# Altium PCB PowerBoard.PcbDoc
Units mm, origin at the board's own origin, x right, y up, seen from the top; angles counter-clockwise.
Board outline 99.35 x 133.95 mm, 4 copper layers (Top Layer, Signal Layer 1, Signal Layer 2, Bottom Layer), stack 1.55 mm thick; 65 components, 18 nets, 330 pads, 142 vias.
Unrouted connection lines stored in the file: 233.
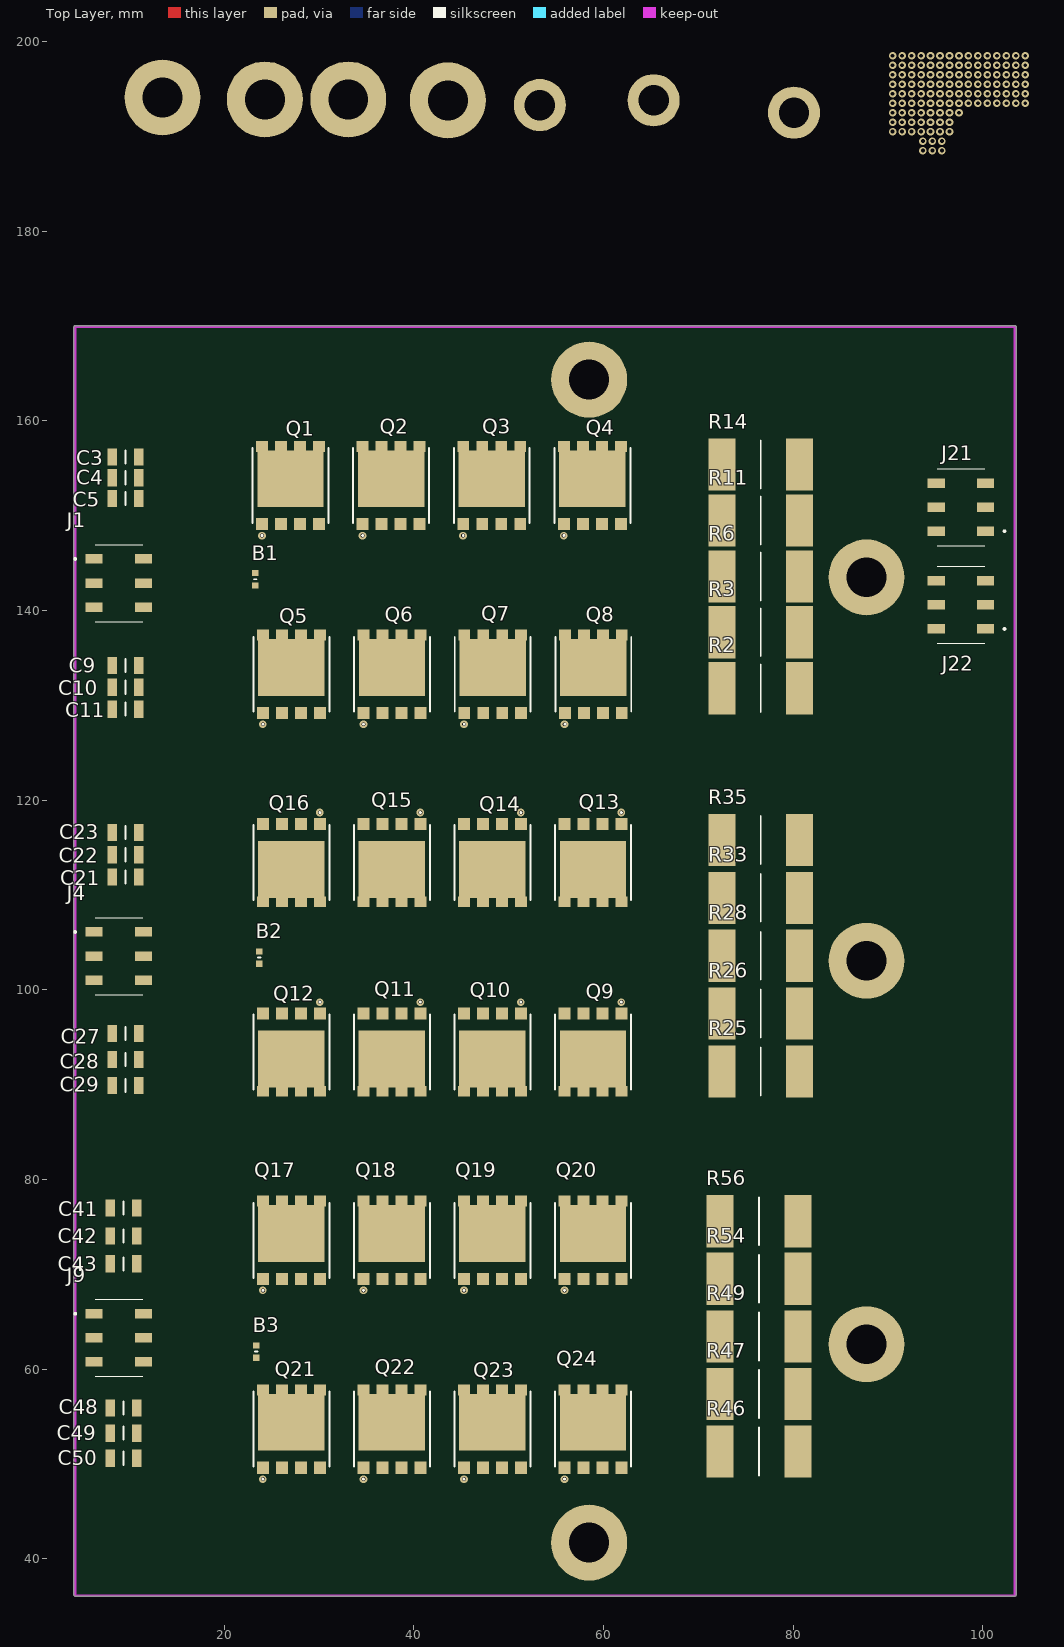
[diagram p0: Top Layer view]
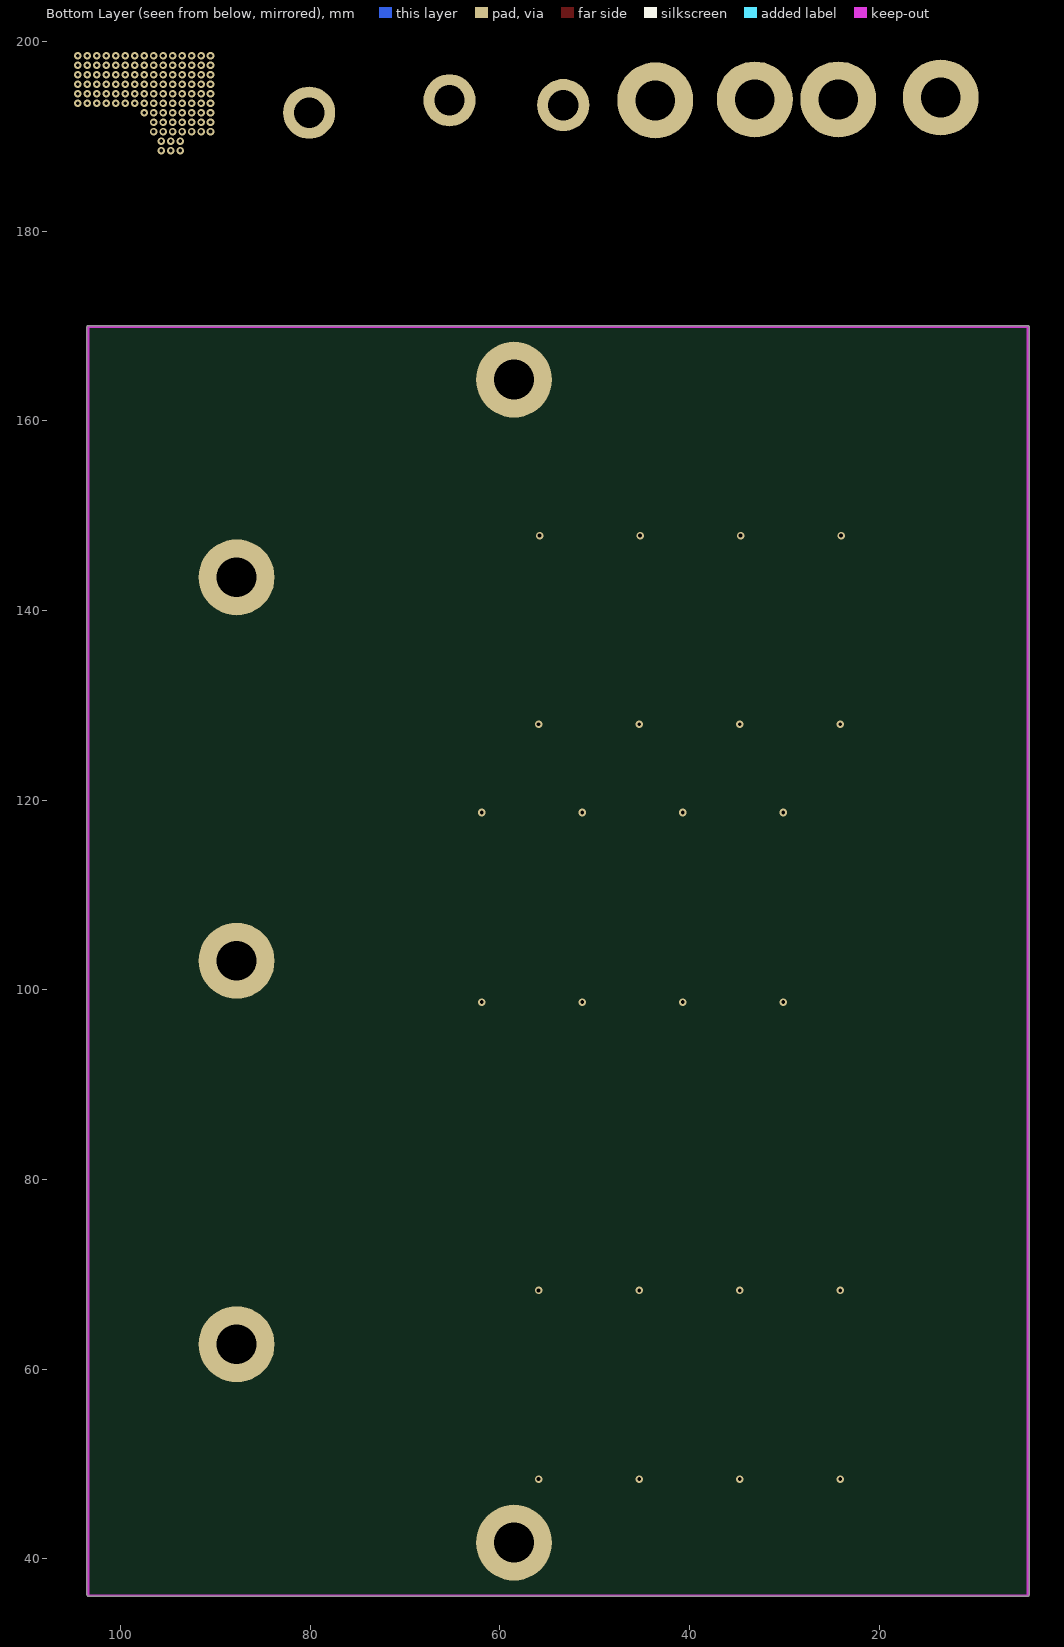
[diagram p1: Bottom Layer view, seen from below]

## Layer stack, top to bottom
Top Solder: solder mask 0.025, Solder Resist, Dk 3.5
Top Layer: signal copper 0.018
Dielectric 2: core 0.254, Dk 4.2
Signal Layer 1: signal copper 0.036
Dielectric 4: core 0.934, Dk 4.2
Signal Layer 2: signal copper 0.036
Dielectric 3: core 0.254, Dk 4.2
Bottom Layer: signal copper 0.018
Bottom Solder: solder mask 0.025, Solder Resist, Dk 3.5

## Board outline
4.173,36.2 4.173,169.9 cw(c4.3,169.9) 4.3,170.027 103.4,170.027 cw(c103.4,169.9) 103.527,169.9 103.527,36.2 cw(c103.4,36.2) 103.4,36.073 4.3,36.073 cw(c4.3,36.2)

## Design rules (kind name [scope] priority, off if disabled: settings)
AssemblyTestPointUsage AssemblyTestPointUsage_1 [All] p2:
AssemblyTestpoint AssemblyTestpoint_1 [All] p1: testpointundercomponent=TRUE minsize=1.016 maxsize=2.54 preferedsize=1.524 minholesize=0 maxholesize=1.016 preferedholesize=0.813 testpointgrid=0.025 usegrid=TRUE gridtolerance=0 allowsidetop=TRUE allowsidebottom=TRUE
Clearance Clearance_1 [All] p1: gap=0.5 ignorepadtopadclearanceinfootprint=FALSE except(0: Arc-Hole Track-Hole SMDPad-Hole THPad-Hole Via-Hole Fill-Hole Poly-Hole Region-Hole Text-Hole; 0.2: Arc-Arc Arc-Track Arc-SMDPad Arc-THPad Arc-Via Track-Track Track-SMDPad Track-THPad Track-Via SMDPad-SMDPad SMDPad-THPad SMDPad-Via THPad-THPad THPad-Via Via-Via)
ComponentClearance ComponentClearance_1 [All] p1: gap=0.2 collisioncheckmode=3 verticalgap=0.2 showdistances=TRUE
DiffPairsRouting DiffPairsRouting_1 [All] p1: maxlimit=0.254 minlimit=0.254 mostfreqgap=0.254 substack1={0391787D-B3DB-4B16-B312-97C439599AB4} toplayer_{0391787d-b3db-4b16-b312-97c439599ab4}_minwidth=0.381 toplayer_{0391787d-b3db-4b16-b312-97c439599ab4}_maxwidth=0.381 toplayer_{0391787d-b3db-4b16-b312-97c439599ab4}_prefwidth=0.381 midlayer1_{0391787d-b3db-4b16-b312-97c439599ab4}_minwidth=0.381 midlayer1_{0391787d-b3db-4b16-b312-97c439599ab4}_maxwidth=0.381 midlayer1_{0391787d-b3db-4b16-b312-97c439599ab4}_prefwidth=0.381 midlayer2_{0391787d-b3db-4b16-b312-97c439599ab4}_minwidth=0.381 midlayer2_{0391787d-b3db-4b16-b312-97c439599ab4}_maxwidth=0.381 midlayer2_{0391787d-b3db-4b16-b312-97c439599ab4}_prefwidth=0.381 bottomlayer_{0391787d-b3db-4b16-b312-97c439599ab4}_minwidth=0.381 bottomlayer_{0391787d-b3db-4b16-b312-97c439599ab4}_maxwidth=0.381 bottomlayer_{0391787d-b3db-4b16-b312-97c439599ab4}_prefwidth=0.381 substack2={0E55BCC6-0461-4BB8-A6DB-68FAAC3CF03A} toplayer_{0e55bcc6-0461-4bb8-a6db-68faac3cf03a}_minwidth=0.381 toplayer_{0e55bcc6-0461-4bb8-a6db-68faac3cf03a}_maxwidth=0.381 toplayer_{0e55bcc6-0461-4bb8-a6db-68faac3cf03a}_prefwidth=0.381 midlayer1_{0e55bcc6-0461-4bb8-a6db-68faac3cf03a}_minwidth=0.381 midlayer1_{0e55bcc6-0461-4bb8-a6db-68faac3cf03a}_maxwidth=0.381 midlayer1_{0e55bcc6-0461-4bb8-a6db-68faac3cf03a}_prefwidth=0.381 midlayer2_{0e55bcc6-0461-4bb8-a6db-68faac3cf03a}_minwidth=0.381 midlayer2_{0e55bcc6-0461-4bb8-a6db-68faac3cf03a}_maxwidth=0.381 midlayer2_{0e55bcc6-0461-4bb8-a6db-68faac3cf03a}_prefwidth=0.381 bottomlayer_{0e55bcc6-0461-4bb8-a6db-68faac3cf03a}_minwidth=0.381 bottomlayer_{0e55bcc6-0461-4bb8-a6db-68faac3cf03a}_maxwidth=0.381 bottomlayer_{0e55bcc6-0461-4bb8-a6db-68faac3cf03a}_prefwidth=0.381 substack3={7F91D735-8F98-4998-8FBE-C2B075826548} toplayer_{7f91d735-8f98-4998-8fbe-c2b075826548}_minwidth=0.381 toplayer_{7f91d735-8f98-4998-8fbe-c2b075826548}_maxwidth=0.381 toplayer_{7f91d735-8f98-4998-8fbe-c2b075826548}_prefwidth=0.381 midlayer1_{7f91d735-8f98-4998-8fbe-c2b075826548}_minwidth=0.381 midlayer1_{7f91d735-8f98-4998-8fbe-c2b075826548}_maxwidth=0.381 midlayer1_{7f91d735-8f98-4998-8fbe-c2b075826548}_prefwidth=0.381 midlayer2_{7f91d735-8f98-4998-8fbe-c2b075826548}_minwidth=0.381 midlayer2_{7f91d735-8f98-4998-8fbe-c2b075826548}_maxwidth=0.381 midlayer2_{7f91d735-8f98-4998-8fbe-c2b075826548}_prefwidth=0.381 bottomlayer_{7f91d735-8f98-4998-8fbe-c2b075826548}_minwidth=0.381 bottomlayer_{7f91d735-8f98-4998-8fbe-c2b075826548}_maxwidth=0.381 bottomlayer_{7f91d735-8f98-4998-8fbe-c2b075826548}_prefwidth=0.381 substack4={4ED4D01E-40BF-4D50-BA5A-F23A5EC9E761} toplayer_{4ed4d01e-40bf-4d50-ba5a-f23a5ec9e761}_minwidth=0.381 toplayer_{4ed4d01e-40bf-4d50-ba5a-f23a5ec9e761}_maxwidth=0.381 toplayer_{4ed4d01e-40bf-4d50-ba5a-f23a5ec9e761}_prefwidth=0.381 midlayer1_{4ed4d01e-40bf-4d50-ba5a-f23a5ec9e761}_minwidth=0.381 midlayer1_{4ed4d01e-40bf-4d50-ba5a-f23a5ec9e761}_maxwidth=0.381 midlayer1_{4ed4d01e-40bf-4d50-ba5a-f23a5ec9e761}_prefwidth=0.381 midlayer2_{4ed4d01e-40bf-4d50-ba5a-f23a5ec9e761}_minwidth=0.381 midlayer2_{4ed4d01e-40bf-4d50-ba5a-f23a5ec9e761}_maxwidth=0.381 midlayer2_{4ed4d01e-40bf-4d50-ba5a-f23a5ec9e761}_prefwidth=0.381 bottomlayer_{4ed4d01e-40bf-4d50-ba5a-f23a5ec9e761}_minwidth=0.381 bottomlayer_{4ed4d01e-40bf-4d50-ba5a-f23a5ec9e761}_maxwidth=0.381 bottomlayer_{4ed4d01e-40bf-4d50-ba5a-f23a5ec9e761}_prefwidth=0.381 substack5={57BA5FAC-A096-47A8-A9C3-28502E285703} toplayer_{57ba5fac-a096-47a8-a9c3-28502e285703}_minwidth=0.381 toplayer_{57ba5fac-a096-47a8-a9c3-28502e285703}_maxwidth=0.381 toplayer_{57ba5fac-a096-47a8-a9c3-28502e285703}_prefwidth=0.381 midlayer1_{57ba5fac-a096-47a8-a9c3-28502e285703}_minwidth=0.381 midlayer1_{57ba5fac-a096-47a8-a9c3-28502e285703}_maxwidth=0.381 midlayer1_{57ba5fac-a096-47a8-a9c3-28502e285703}_prefwidth=0.381 midlayer2_{57ba5fac-a096-47a8-a9c3-28502e285703}_minwidth=0.381 midlayer2_{57ba5fac-a096-47a8-a9c3-28502e285703}_maxwidth=0.381 midlayer2_{57ba5fac-a096-47a8-a9c3-28502e285703}_prefwidth=0.381 bottomlayer_{57ba5fac-a096-47a8-a9c3-28502e285703}_minwidth=0.381 bottomlayer_{57ba5fac-a096-47a8-a9c3-28502e285703}_maxwidth=0.381 bottomlayer_{57ba5fac-a096-47a8-a9c3-28502e285703}_prefwidth=0.381 toplayer_minwidth=0.381 toplayer_maxwidth=0.381 toplayer_prefwidth=0.381 midlayer1_minwidth=0.381 midlayer1_maxwidth=0.381 midlayer1_prefwidth=0.381 midlayer2_minwidth=0.381 midlayer2_maxwidth=0.381 midlayer2_prefwidth=0.381 bottomlayer_minwidth=0.381 bottomlayer_maxwidth=0.381 bottomlayer_prefwidth=0.381 substack6={B351C19E-D50C-4F2F-B5BB-791B69F230FF} toplayer_{b351c19e-d50c-4f2f-b5bb-791b69f230ff}_minwidth=0.381 toplayer_{b351c19e-d50c-4f2f-b5bb-791b69f230ff}_maxwidth=0.381 toplayer_{b351c19e-d50c-4f2f-b5bb-791b69f230ff}_prefwidth=0.381 midlayer1_{b351c19e-d50c-4f2f-b5bb-791b69f230ff}_minwidth=0.381 midlayer1_{b351c19e-d50c-4f2f-b5bb-791b69f230ff}_maxwidth=0.381 midlayer1_{b351c19e-d50c-4f2f-b5bb-791b69f230ff}_prefwidth=0.381 midlayer2_{b351c19e-d50c-4f2f-b5bb-791b69f230ff}_minwidth=0.381 midlayer2_{b351c19e-d50c-4f2f-b5bb-791b69f230ff}_maxwidth=0.381 midlayer2_{b351c19e-d50c-4f2f-b5bb-791b69f230ff}_prefwidth=0.381 bottomlayer_{b351c19e-d50c-4f2f-b5bb-791b69f230ff}_minwidth=0.381 bottomlayer_{b351c19e-d50c-4f2f-b5bb-791b69f230ff}_maxwidth=0.381 bottomlayer_{b351c19e-d50c-4f2f-b5bb-791b69f230ff}_prefwidth=0.381 substack7={2F1B6B62-C7FD-47FC-965D-ED7560D8E9E8} toplayer_{2f1b6b62-c7fd-47fc-965d-ed7560d8e9e8}_minwidth=0.381 toplayer_{2f1b6b62-c7fd-47fc-965d-ed7560d8e9e8}_maxwidth=0.381 toplayer_{2f1b6b62-c7fd-47fc-965d-ed7560d8e9e8}_prefwidth=0.381 midlayer1_{2f1b6b62-c7fd-47fc-965d-ed7560d8e9e8}_minwidth=0.381 midlayer1_{2f1b6b62-c7fd-47fc-965d-ed7560d8e9e8}_maxwidth=0.381 midlayer1_{2f1b6b62-c7fd-47fc-965d-ed7560d8e9e8}_prefwidth=0.381 midlayer2_{2f1b6b62-c7fd-47fc-965d-ed7560d8e9e8}_minwidth=0.381 midlayer2_{2f1b6b62-c7fd-47fc-965d-ed7560d8e9e8}_maxwidth=0.381 midlayer2_{2f1b6b62-c7fd-47fc-965d-ed7560d8e9e8}_prefwidth=0.381 bottomlayer_{2f1b6b62-c7fd-47fc-965d-ed7560d8e9e8}_minwidth=0.381 bottomlayer_{2f1b6b62-c7fd-47fc-965d-ed7560d8e9e8}_maxwidth=0.381 bottomlayer_{2f1b6b62-c7fd-47fc-965d-ed7560d8e9e8}_prefwidth=0.381 substack8={A0CE5E7A-17C9-422A-884C-87F0A86ADDD9} toplayer_{a0ce5e7a-17c9-422a-884c-87f0a86addd9}_minwidth=0.381 toplayer_{a0ce5e7a-17c9-422a-884c-87f0a86addd9}_maxwidth=0.381 toplayer_{a0ce5e7a-17c9-422a-884c-87f0a86addd9}_prefwidth=0.381 midlayer1_{a0ce5e7a-17c9-422a-884c-87f0a86addd9}_minwidth=0.381 midlayer1_{a0ce5e7a-17c9-422a-884c-87f0a86addd9}_maxwidth=0.381 midlayer1_{a0ce5e7a-17c9-422a-884c-87f0a86addd9}_prefwidth=0.381 midlayer2_{a0ce5e7a-17c9-422a-884c-87f0a86addd9}_minwidth=0.381 midlayer2_{a0ce5e7a-17c9-422a-884c-87f0a86addd9}_maxwidth=0.381 midlayer2_{a0ce5e7a-17c9-422a-884c-87f0a86addd9}_prefwidth=0.381 bottomlayer_{a0ce5e7a-17c9-422a-884c-87f0a86addd9}_minwidth=0.381 bottomlayer_{a0ce5e7a-17c9-422a-884c-87f0a86addd9}_maxwidth=0.381 bottomlayer_{a0ce5e7a-17c9-422a-884c-87f0a86addd9}_prefwidth=0.381 maxuncoupledlength=12.7
FabricationTestPointUsage FabricationTestPointUsage_1 [All] p1: valid=0 allowmultiple=FALSE
FabricationTestpoint FabricationTestpoint_1 [All] p1: side=3 testpointundercomponent=TRUE minsize=1.016 maxsize=2.54 preferedsize=1.524 minholesize=0 maxholesize=1.016 preferedholesize=0.813 testpointgrid=0.025 allowsidetop=TRUE allowsidebottom=TRUE usegrid=TRUE gridtolerance=0
FanoutControl Fanout_BGA_1 [IsBGA] p1: bgadir=Out bgaviamode=Centered fanoutstyle=Auto fanoutdirection=Alternating viagrid=0.025 // Fanout_BGA (Default Rule)
FanoutControl Fanout_LCC_1 [IsLCC] p2: bgadir=Out bgaviamode=Centered fanoutstyle=Auto fanoutdirection=Alternating viagrid=0.025 // Fanout_LCC (Default Rule)
FanoutControl Fanout_SOIC_1 [IsSOIC] p3: bgadir=Out bgaviamode=Centered fanoutstyle=Auto fanoutdirection=Alternating viagrid=0.025 // Fanout_SOIC (Default Rule)
FanoutControl Fanout_Small_1 [(CompPinCount < 5)] p4: bgadir=Out bgaviamode=Centered fanoutstyle=Auto fanoutdirection=OutThenIn viagrid=0.025 // Fanout_Small (Default Rule)
FanoutControl Fanout_Default_1 [All] p5: bgadir=Out bgaviamode=Centered fanoutstyle=Auto fanoutdirection=Alternating viagrid=0.025 // Fanout_Default (Default Rule)
Height Height_1 [All] p1: minheight=0 maxheight=25.4 prefheight=12.7
HoleSize HoleSize_1 [All] p1: absolutevalues=TRUE maxlimit=5 minlimit=0.3 maxpercent=80.000 minpercent=20.000
HoleToHoleClearance HoleToHoleClearance_1 [All] p1: gap=0.254 allowstackedmicrovias=TRUE
LayerPairs LayerPairs_1 [All] p1: enforce=TRUE
MinimumSolderMaskSliver MinimumSolderMaskSliver_1 [All] p1: minsoldermaskwidth=0.1
NetAntennae NetAntennae_1 [InNetClass('VIN')] p1: netantennaetolerance=0
PasteMaskExpansion PasteMaskExpansion_1 [All] p1: expansion=0
PlaneClearance PlaneClearance_1 [All] p1: clearance=0.508
PlaneConnect PlaneConnect_1 [All] p1: planeconnectstyle=Relief reliefexpansion=0.508 reliefentries=4 reliefconductorwidth=0.254 reliefairgap=0.254
PolygonConnect PolygonConnect_1 [All] p1: connectstyle=Direct reliefconductorwidth=0.254 reliefentries=4 polygonreliefangle="90 Angle" airgapwidth=0.254
RoomDefinition PowerBoard [InComponentClass('PowerBoard')] p1: confinementstyle=ConfineOut formatcopy=TRUE lockcomponents=FALSE outline 34.1,10.764 57.8,10.764 57.8,16.2 34.1,16.2
RoutingCorners RoutingCorners_1 [All] p1: cornerstyle=45-Degree minsetback=2.54 maxsetback=2.54
RoutingLayers RoutingLayers_1 [All] p1: top layer_v5=TRUE mid layer 1_v5=TRUE mid layer 2_v5=TRUE bottom layer_v5=TRUE
RoutingPriority RoutingPriority_1 [All] p1: routingpriority=0
RoutingTopology RoutingTopology_1 [All] p1: topology=Shortest
RoutingVias RoutingVias_1 [All] p1: holewidth=0.4 width=0.8 viastyle="Through Hole" minholewidth=0.3 minwidth=0.6 maxholewidth=5 maxwidth=10
ShortCircuit ShortCircuit_1 [All] p1: allowed=FALSE
SilkToBoardRegionClearance SilkToBoardRegionClearance_1 [All] p2:
SilkToSilkClearance SilkToSilkClearance_1 [All] p1: silktosilkclearance=0
SilkToSolderMaskClearance SilkToSolderMaskClearance_1 [IsPad] p1: minsilkscreentomaskgap=0 clearancetoexposedcopper=TRUE
SolderMaskExpansion SolderMaskExpansion_1 [All] p1: expansion=0.102 istentingtop=FALSE
UnRoutedNet UnRoutedNet_1 [All] p1:
UnpouredPolygon UnpouredPolygon_1 [All] p1:
Width Width_1 [All] p1: maxlimit=3.048 minlimit=0.2 preferedwidth=0.254 substack1={0391787D-B3DB-4B16-B312-97C439599AB4} substack2={0E55BCC6-0461-4BB8-A6DB-68FAAC3CF03A} substack3={7F91D735-8F98-4998-8FBE-C2B075826548} substack4={4ED4D01E-40BF-4D50-BA5A-F23A5EC9E761} substack5={57BA5FAC-A096-47A8-A9C3-28502E285703} substack6={B351C19E-D50C-4F2F-B5BB-791B69F230FF} substack7={2F1B6B62-C7FD-47FC-965D-ED7560D8E9E8} substack8={A0CE5E7A-17C9-422A-884C-87F0A86ADDD9}
2 further rules are at their usual default settings.

## Components (designator, comment, footprint, x,y, rotation, side; value= is the part's Value field where it differs from the comment)
B1 "NTCS0402E3103GL1T" THRMC1005X65N 23.3,143.3 r270 top
B2 "NTCS0402E3103GL1T" THRMC1005X65N 23.7,103.4 r90 top
B3 "NTCS0402E3103GL1T" THRMC1005X65N 23.4,61.85 r90 top
C3 "2.2uF 100V" CAPC3216X178N 9.6,156.2 r0 top
C4 "2.2uF 100V" CAPC3216X178N 9.6,154 r0 top
C5 "2.2uF 100V" CAPC3216X178N 9.6,151.8 r0 top
C9 "2.2uF 100V" CAPC3216X178N 9.6,134.2 r180 top
C10 "2.2uF 100V" CAPC3216X178N 9.6,131.9 r180 top
C11 "2.2uF 100V" CAPC3216X178N 9.6,129.6 r180 top
C21 "2.2uF 100V" CAPC3216X178N 9.6,111.9 r0 top
C22 "2.2uF 100V" CAPC3216X178N 9.6,114.25 r0 top
C23 "2.2uF 100V" CAPC3216X178N 9.6,116.6 r0 top
C27 "2.2uF 100V" CAPC3216X178N 9.6,95.4 r0 top
C28 "2.2uF 100V" CAPC3216X178N 9.6,92.65 r0 top
C29 "2.2uF 100V" CAPC3216X178N 9.6,89.9 r0 top
C41 "2.2uF 100V" CAPC3216X178N 9.4,77 r180 top
C42 "2.2uF 100V" CAPC3216X178N 9.4,74.05 r180 top
C43 "2.2uF 100V" CAPC3216X178N 9.4,71.1 r180 top
C48 "2.2uF 100V" CAPC3216X178N 9.4,55.9 r0 top
C49 "2.2uF 100V" CAPC3216X178N 9.4,53.25 r0 top
C50 "2.2uF 100V" CAPC3216X178N 9.4,50.6 r0 top
J1 "PHASE_U" 61030621821 8.9,142.9 r270 top value=61030621821
J4 "PHASE_V" 61030621821 8.9,103.56 r270 top value=61030621821
J9 "PHASE_W" 61030621821 8.9,63.3 r270 top value=61030621821
J21 "VIN+" 61030621821 97.7,150.9 r90 top value=61030621821
J22 "VIN-" 61030621821 97.7,140.6 r90 top value=61030621821
Q1 "NTMSC002N10MCTXG" NTMSC002N10MCTXG 27,154.02 r90 top
Q2 "NTMSC002N10MCTXG" NTMSC002N10MCTXG 37.614,154.02 r90 top
Q3 "NTMSC002N10MCTXG" NTMSC002N10MCTXG 48.229,154.02 r90 top
Q4 "NTMSC002N10MCTXG" NTMSC002N10MCTXG 58.843,154.02 r90 top
Q5 "NTMSC002N10MCTXG" NTMSC002N10MCTXG 27.1,134.115 r90 top
Q6 "NTMSC002N10MCTXG" NTMSC002N10MCTXG 37.714,134.115 r90 top
Q7 "NTMSC002N10MCTXG" NTMSC002N10MCTXG 48.329,134.115 r90 top
Q8 "NTMSC002N10MCTXG" NTMSC002N10MCTXG 58.943,134.115 r90 top
Q9 "NTMSC002N10MCTXG" NTMSC002N10MCTXG 58.9,92.6 r270 top
Q10 "NTMSC002N10MCTXG" NTMSC002N10MCTXG 48.3,92.6 r270 top
Q11 "NTMSC002N10MCTXG" NTMSC002N10MCTXG 37.7,92.6 r270 top
Q12 "NTMSC002N10MCTXG" NTMSC002N10MCTXG 27.1,92.6 r270 top
Q13 "NTMSC002N10MCTXG" NTMSC002N10MCTXG 58.9,112.58 r270 top
Q14 "NTMSC002N10MCTXG" NTMSC002N10MCTXG 48.3,112.58 r270 top
Q15 "NTMSC002N10MCTXG" NTMSC002N10MCTXG 37.7,112.58 r270 top
Q16 "NTMSC002N10MCTXG" NTMSC002N10MCTXG 27.1,112.58 r270 top
Q17 "NTMSC002N10MCTXG" NTMSC002N10MCTXG 27.1,74.415 r90 top
Q18 "NTMSC002N10MCTXG" NTMSC002N10MCTXG 37.7,74.415 r90 top
Q19 "NTMSC002N10MCTXG" NTMSC002N10MCTXG 48.3,74.415 r90 top
Q20 "NTMSC002N10MCTXG" NTMSC002N10MCTXG 58.9,74.415 r90 top
Q21 "NTMSC002N10MCTXG" NTMSC002N10MCTXG 27.1,54.515 r90 top
Q22 "NTMSC002N10MCTXG" NTMSC002N10MCTXG 37.7,54.515 r90 top
Q23 "NTMSC002N10MCTXG" NTMSC002N10MCTXG 48.3,54.515 r90 top
Q24 "NTMSC002N10MCTXG" NTMSC002N10MCTXG 58.9,54.515 r90 top
R2 "0.5mR/9W" RESC10052X137N 76.6,131.8 r180 top value="0.5ohm 9W"
R3 "0.5mR/9W" RESC10052X137N 76.6,137.7 r180 top value="0.5ohm 9W"
R6 "0.5mR/9W" RESC10052X137N 76.6,143.6 r180 top value="0.5ohm 9W"
R11 "0.5mR/9W" RESC10052X137N 76.6,149.5 r180 top value="0.5ohm 9W"
R14 "0.5mR/9W" RESC10052X137N 76.6,155.4 r180 top value="0.5ohm 9W"
R25 "0.5mR/9W" RESC10052X137N 76.6,91.4 r180 top value="0.5ohm 9W"
R26 "0.5mR/9W" RESC10052X137N 76.6,97.5 r180 top value="0.5ohm 9W"
R28 "0.5mR/9W" RESC10052X137N 76.6,103.6 r180 top value="0.5ohm 9W"
R33 "0.5mR/9W" RESC10052X137N 76.6,109.7 r180 top value="0.5ohm 9W"
R35 "0.5mR/9W" RESC10052X137N 76.6,115.8 r180 top value="0.5ohm 9W"
R46 "0.5mR/9W" RESC10052X137N 76.4,51.3 r180 top value="0.5ohm 9W"
R47 "0.5mR/9W" RESC10052X137N 76.4,57.375 r180 top value="0.5ohm 9W"
R49 "0.5mR/9W" RESC10052X137N 76.4,63.45 r180 top value="0.5ohm 9W"
R54 "0.5mR/9W" RESC10052X137N 76.4,69.525 r180 top value="0.5ohm 9W"
R56 "0.5mR/9W" RESC10052X137N 76.4,75.6 r180 top value="0.5ohm 9W"

## Footprints (in the part's own frame and the unit in brackets; to place one, negate y for a bottom-side part, rotate by r counter-clockwise, add the part's x,y. Pads: shape width x height; smd on the part's side, far side on the other; paste and mask are expansions set on the pad)
61030621821 [mm]
  rect 1x1.8 smd: 1(-2.54,-2.6) 2(-2.54,2.6) 3(0,-2.6) 4(0,2.6) 5(2.54,-2.6) 6(2.54,2.6)
  silkscreen extent -4.06,-4.7 4.06,2.5, body extent -4.06,-3.4 4.06,3.4, height 7.85
CAPC3216X178N [mm]
  rect 1.02x1.82 smd: 1(-1.4,0) 2(1.4,0)
  silkscreen extent 0,-0.7 0,0.7, body extent -1.6,-0.8 1.6,0.8, height 1.78
NTMSC002N10MCTXG [mm]
  rect 6x7 smd: DRAIN(-0.12,0)
  rect 1.15x1.25 smd: DRAIN(3.295,-3) DRAIN(3.295,-1) DRAIN(3.295,1) DRAIN(3.295,3)
  rect 1.28x1.25 smd: GATE(-4.915,3) SOURCE(-4.915,-3) SOURCE(-4.915,-1) SOURCE(-4.915,1)
  silkscreen extent -6.16,-4 3.11,4, body extent -5.03,-4.15 3.37,4.15, height 1.02
RESC10052X137N [mm]
  rect 2.85x5.5 smd: 1(-4.1,0) 2(4.1,0)
  silkscreen extent 0,-2.52 0,2.52, body extent -5,-2.63 5,2.63, height 1.37
THRMC1005X65N [mm]
  rect 0.65x0.7 smd: 1(-0.65,0) 2(0.65,0)
  silkscreen extent 0,-0.15 0,0.15, body extent -0.5,-0.25 0.5,0.25, height 0.65

## Part data
B1 B2 B3: "NTC Thermistors 10Kohms 2% AEC-Q200", Manufacturer=Vishay, Supplier Part Number=594-NTCS402E3103GL1T, Manufacturer Part Number=NTCS0402E3103GL1T, Price=0.47, Supplier=Mouser
C3 C4 C5 C9 C10 C11 C21 C22 C23 C27 C28 C29 C41 C42 C43 C48 C49 C50: library part "2.2uF ±10% 100V", "Multilayer Ceramic Capacitors MLCC - SMD/SMT 100V 2.2uF X7R 1206 20%TOL HIGH CV", Manufacturer="KYOCERA AVX", Manufacturer Part Number=12061C225MAT2A, Supplier Part Number=581-12061C225MAT2A, Price=0.5, Supplier=Mouser
J1 J4 J9 J21 J22: library part "Female Header 6 Pin_1", "Headers & Wire Housings WERI Header 2,54 mm SMT", Manufacturer="Wurth Elektronik", Manufacturer Part Number=61030621821, Supplier Part Number=710-61030621821, Price=1.8, Supplier=Mouser
Q1 Q2 Q3 Q4 Q5 Q6 Q7 Q8 Q9 Q10 Q11 Q12 Q13 Q14 Q15 Q16 Q17 Q18 Q19 Q20 Q21 Q22 Q23 Q24: "MOSFET Single N-Channel Power MOSFET 100V, 236A, 2.0mohm", Manufacturer=Onsemi, Manufacturer Part Number=NTMTSC002N10MCTXG, Supplier Part Number=863-TMTSC002N10MCTXG, Price=5.9, Supplier=Mouser
R2 R3 R6 R11 R14 R25 R26 R28 R33 R35 R46 R47 R49 R54 R56: library part CSS2H-3920R-L500FE, "Current Sense Resistors - SMD 0.5mOHMS 9W 1% AEC-Q200", Manufacturer=Bourns, Supplier Part Number=652-CSS2H3920RL500FE, Manufacturer Part Number=CSS2H-3920R-L500FE, Price=2, Supplier=Mouser

## Free pads (board coordinates)
  round 5.5 hole 3.2: 0(53.3,193.3) 0(65.3,193.8) 0(80.1,192.5)
  round 8 hole 4.2: 3(13.5,194.1) 3(24.3,193.9) 3(33.1,193.9) 3(43.6,193.8) 3(58.5,41.7) 3(58.5,164.346) 3(87.75,62.619) 3(87.75,103.06) 3(87.75,143.5)

## Via types
v1: diameter 0.8, hole 0.4, Top Layer to Bottom Layer, tented both sides, 142 vias

## Nets (pads, with @x,y where several pads share a name; then routed paths per layer and width w, separated by ;. In a path a pad name is that pad's centre, name@x,y a point inside that pad or via, vN(x,y) a via of type N, cw(c..) or ccw(c..) an arc to the next point about the centre after c; other vN are vias at no path point)
+3V3: B1.1 B2.1 B3.1 J1.3 J4.3 J9.3
GND: C3.1 C4.1 C5.1 C9.2 C10.2 C11.2 C21.1 C22.1 C23.1 C27.2 C28.2 C29.2 C41.1 C42.1 C43.1 C48.2 C49.2 C50.2 J22.1 J22.2 J22.3 J22.4 J22.5 J22.6 pad.3@58.5,41.7 Q5.SOURCE Q6.SOURCE Q7.SOURCE Q8.SOURCE Q13.SOURCE Q14.SOURCE Q15.SOURCE Q16.SOURCE Q21.SOURCE Q22.SOURCE Q23.SOURCE Q24.SOURCE
OUT_U: J1.5 pad.3@87.75,143.5 R2.1 R3.1 R6.1 R11.1 R14.1
OUT_V: J4.5 pad.3@87.75,103.06 R25.1 R26.1 R28.1 R33.1 R35.1
OUT_W: J9.5 pad.3@87.75,62.619 R46.1 R47.1 R49.1 R54.1 R56.1
PHASE_U: J1.6 Q1.SOURCE Q2.SOURCE Q3.SOURCE Q4.SOURCE Q5.DRAIN Q6.DRAIN Q7.DRAIN Q8.DRAIN R2.2 R3.2 R6.2 R11.2 R14.2
PHASE_V: J4.6 Q9.SOURCE Q10.SOURCE Q11.SOURCE Q12.SOURCE Q13.DRAIN Q14.DRAIN Q15.DRAIN Q16.DRAIN R25.2 R26.2 R28.2 R33.2 R35.2
PHASE_W: J9.6 Q17.SOURCE Q18.SOURCE Q19.SOURCE Q20.SOURCE Q21.DRAIN Q22.DRAIN Q23.DRAIN Q24.DRAIN R46.2 R47.2 R49.2 R54.2 R56.2
PWM_U_HIGH: J1.1 Q1.GATE Q2.GATE Q3.GATE Q4.GATE
  other v1: 24,147.9 34.6,147.9 45.2,147.9 55.8,147.9
PWM_U_LOW: J1.2 Q5.GATE Q6.GATE Q7.GATE Q8.GATE
  other v1: 24.1,128 34.7,128 45.3,128 55.9,128
PWM_V_HIGH: J4.1 Q9.GATE Q10.GATE Q11.GATE Q12.GATE
  other v1: 30.1,98.7 40.7,98.7 51.3,98.7 61.9,98.7
PWM_V_LOW: J4.2 Q13.GATE Q14.GATE Q15.GATE Q16.GATE
  other v1: 30.1,118.7 40.7,118.7 51.3,118.7 61.9,118.7
PWM_W_HIGH: J9.1 Q17.GATE Q18.GATE Q19.GATE Q20.GATE
  other v1: 24.1,68.3 34.7,68.3 45.3,68.3 55.9,68.3
PWM_W_LOW: J9.2 Q21.GATE Q22.GATE Q23.GATE Q24.GATE
  other v1: 24.1,48.4 34.7,48.4 45.3,48.4 55.9,48.4
TEMP_U: B1.2 J1.4
TEMP_V: B2.2 J4.4
TEMP_W: B3.2 J9.4
VIN+: C3.2 C4.2 C5.2 C9.1 C10.1 C11.1 C21.2 C22.2 C23.2 C27.1 C28.1 C29.1 C41.2 C42.2 C43.2 C48.1 C49.1 C50.1 J21.1 J21.2 J21.3 J21.4 J21.5 J21.6 pad.3@58.5,164.346 Q1.DRAIN Q2.DRAIN Q3.DRAIN Q4.DRAIN Q9.DRAIN Q10.DRAIN Q11.DRAIN Q12.DRAIN Q17.DRAIN Q18.DRAIN Q19.DRAIN Q20.DRAIN
copper on no net:
  other v1: 93.7,188.5 94.7,188.5 95.7,188.5 93.7,189.5 94.7,189.5 95.7,189.5 90.5,190.5 91.5,190.5 92.5,190.5 93.5,190.5 94.5,190.5 95.5,190.5 96.5,190.5 90.5,191.5 91.5,191.5 92.5,191.5 93.5,191.5 94.5,191.5 95.5,191.5 96.5,191.5 90.5,192.5 91.5,192.5 92.5,192.5 93.5,192.5 94.5,192.5 95.5,192.5 96.5,192.5 97.5,192.5 90.5,193.5 91.5,193.5 92.5,193.5 93.5,193.5 94.5,193.5 95.5,193.5 96.5,193.5 97.5,193.5 98.5,193.5 99.5,193.5 100.5,193.5 101.5,193.5 102.5,193.5 103.5,193.5 104.5,193.5 90.5,194.5 91.5,194.5 92.5,194.5 93.5,194.5 94.5,194.5 95.5,194.5 96.5,194.5 97.5,194.5 98.5,194.5 99.5,194.5 100.5,194.5 101.5,194.5 102.5,194.5 103.5,194.5 104.5,194.5 90.5,195.5 91.5,195.5 92.5,195.5 93.5,195.5 94.5,195.5 95.5,195.5 96.5,195.5 97.5,195.5 98.5,195.5 99.5,195.5 100.5,195.5 101.5,195.5 102.5,195.5 103.5,195.5 104.5,195.5 90.5,196.5 91.5,196.5 92.5,196.5 93.5,196.5 94.5,196.5 95.5,196.5 96.5,196.5 97.5,196.5 98.5,196.5 99.5,196.5 100.5,196.5 101.5,196.5 102.5,196.5 103.5,196.5 104.5,196.5 90.5,197.5 91.5,197.5 92.5,197.5 93.5,197.5 94.5,197.5 95.5,197.5 96.5,197.5 97.5,197.5 98.5,197.5 99.5,197.5 100.5,197.5 101.5,197.5 102.5,197.5 103.5,197.5 104.5,197.5 90.5,198.5 91.5,198.5 92.5,198.5 93.5,198.5 94.5,198.5 95.5,198.5 96.5,198.5 97.5,198.5 98.5,198.5 99.5,198.5 100.5,198.5 101.5,198.5 102.5,198.5 103.5,198.5 104.5,198.5

## Keep-outs
Keep-Out Layer:
  lines w0.254: 4.3,36.1 103.4,36.1 103.4,169.9 4.3,169.9 4.3,36.1

## Other copper
Top Layer:
  pour cut-out: 87.75,98.026 ccw(c87.75,103.026) 92.75,103.026 ccw(c87.75,103.026) 87.75,108.026 ccw(c87.75,103.026) 82.75,103.026 ccw(c87.75,103.026)
  pour cut-out: 87.75,138.467 ccw(c87.75,143.467) 92.75,143.467 ccw(c87.75,143.467) 87.75,148.467 ccw(c87.75,143.467) 82.75,143.467 ccw(c87.75,143.467)
  pour cut-out: 87.75,57.586 ccw(c87.75,62.586) 92.75,62.586 ccw(c87.75,62.586) 87.75,67.586 ccw(c87.75,62.586) 82.75,62.586 ccw(c87.75,62.586)
  pour cut-out: 58.5,36.6 ccw(c58.5,41.6) 63.5,41.6 ccw(c58.5,41.6) 58.5,46.6 ccw(c58.5,41.6) 53.5,41.6 ccw(c58.5,41.6)
  pour cut-out: 58.544,159.312 ccw(c58.544,164.312) 63.544,164.312 ccw(c58.544,164.312) 58.544,169.312 ccw(c58.544,164.312) 53.544,164.312 ccw(c58.544,164.312)

## Silkscreen, mask and mechanical layers (free items; w line width, h text height)
Mechanical 1:
  lines w0.1: 94.3,193.574 94.676,193.95
  lines w0.254: 94.275,190.575 94.325,190.525
Assembly Text Bottom:
  lines w5: 67,50.8 67,75.8 ; 67.1,130.8 67.1,155.8 ; 67.2,91 67.2,116
  lines w7: 16.5,83.535 59.6,83.445 ; 16.5,83.7 16.5,164.435 59.2,164.346 ; 26.199,41.683 97.3,41.535 97.3,123.339 27.642,123.472 ; 28.601,63.493 65.5,63.4 ; 28.701,104.093 65.6,104 ; 28.901,142.593 65.8,142.5 ; 87.7,75 87.8,52.4 ; 87.7,114.7 87.8,92.1 ; 87.7,154.8 87.8,132.2

## Dimensions
87.75,103.06 to 87.75,62.619 on Top Paste
87.75,143.5 to 87.75,103.06 on Top Paste
87.75,143.5 to 103.4,169.9 on Top Paste
58.5,164.346 to 103.4,169.9 on Top Paste
4.3,169.9 to 58.5,164.346 on Top Paste
47.8,36.2 to 92.7,41.754 on Top Paste
58.5,164.346 to 103.4,169.9 on Top Paste
103.4,169.9 to 87.75,143.5 on Top Paste
4.3,36.1 to 103.4,36.1 on Top Overlay
103.4,169.9 to 103.4,36.1 on Top Overlay
62.5,68.8 to 62.6,48.9 on Top Paste
62.5,88.7 to 62.6,68.8 on Top Paste
62.5,108.6 to 62.6,88.7 on Top Paste
62.5,128.5 to 62.6,108.6 on Top Paste
62.5,148.4 to 62.6,128.5 on Top Paste